# Altium PCB DisplayBoard.PcbDoc
Units mil, origin at the board's own origin, x right, y up, seen from the top; angles counter-clockwise.
Board outline 4783.46 x 2992.13 mil, 2 copper layers (Top Layer, Bottom Layer); 11 components, 12 nets, 62 pads, 0 vias.
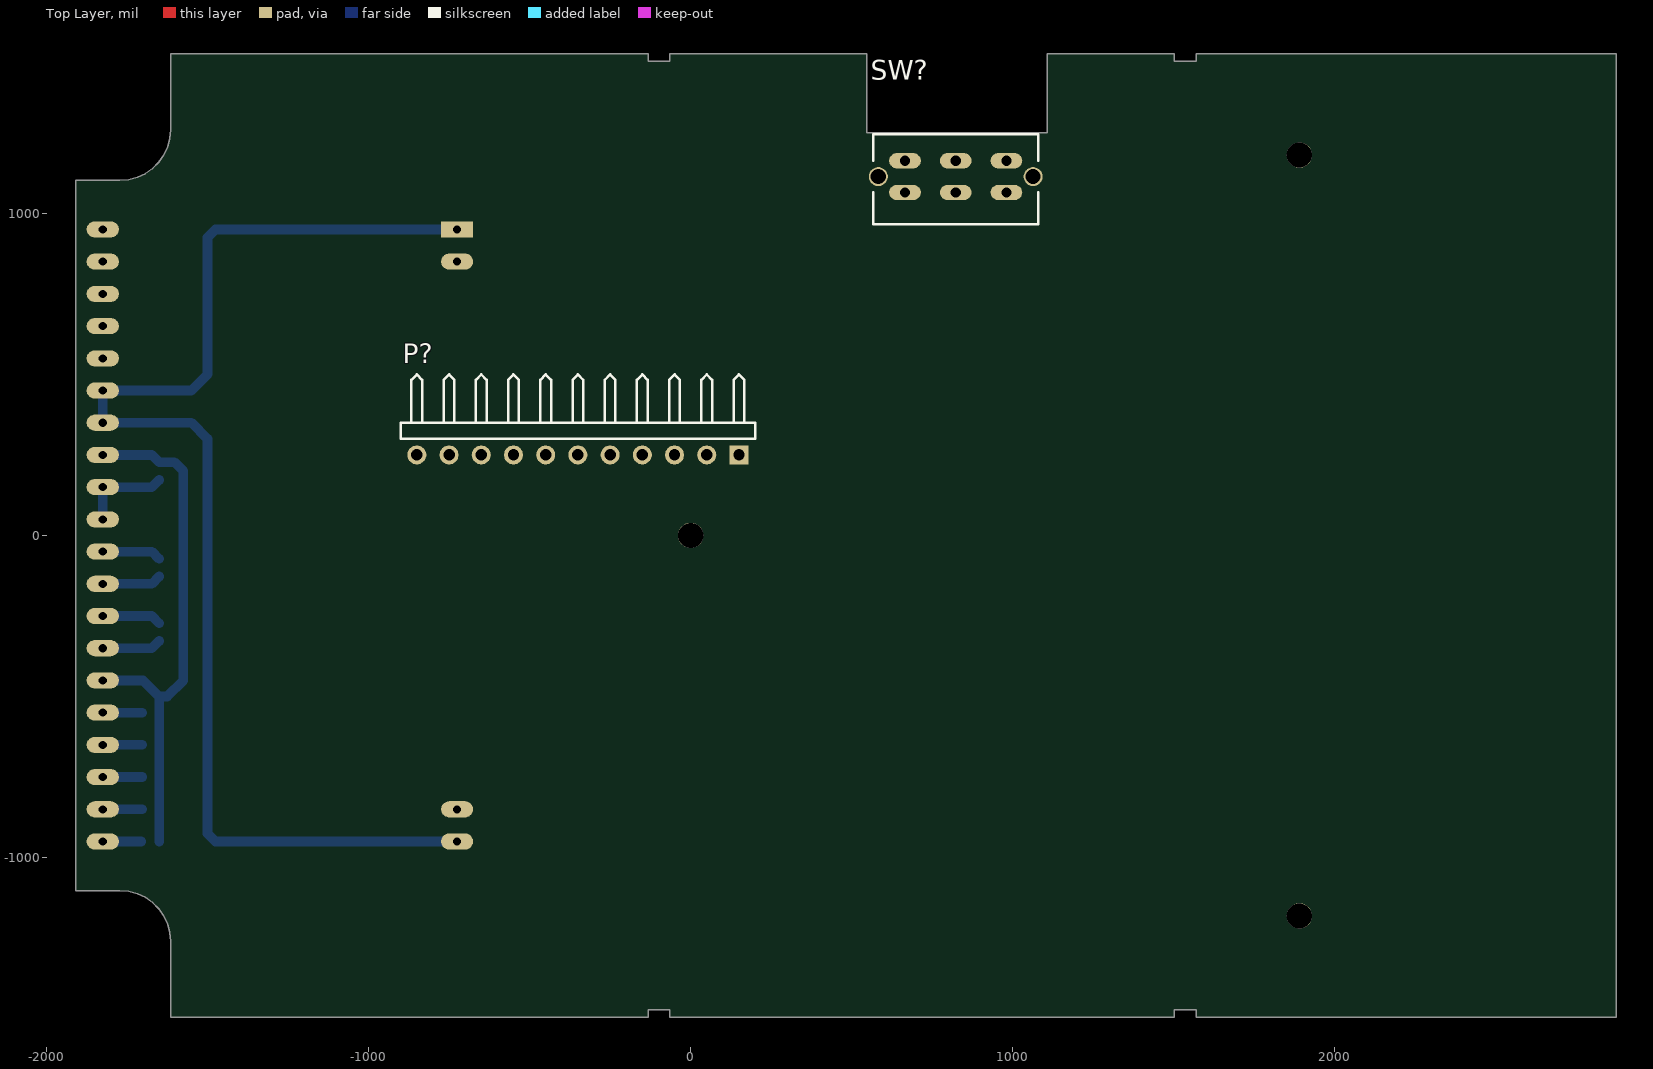
[diagram p0: Top Layer view]
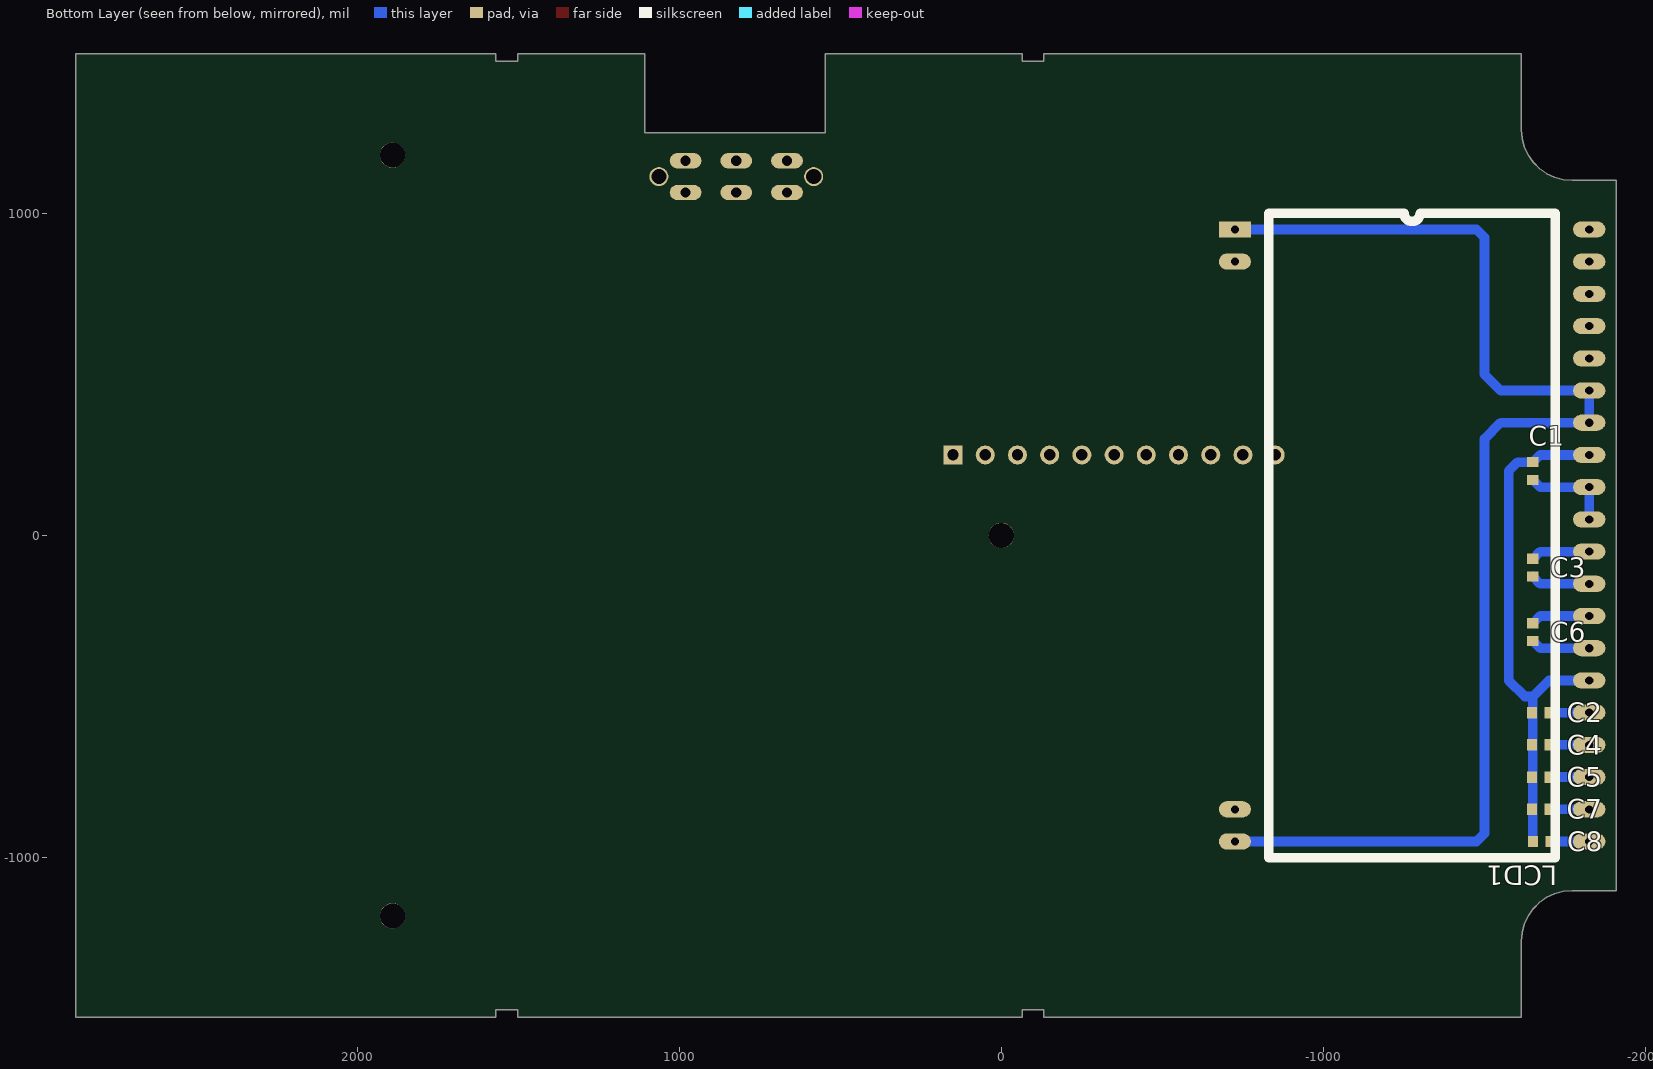
[diagram p1: Bottom Layer view, seen from below]

## Layer stack, top to bottom
Top Solder: solder mask 0.4, Solder Resist, Dk 3.5
Top Layer: signal copper 1.4
Dielectric 1: dielectric 12.6, FR-4, Dk 4.8
Bottom Layer: signal copper 1.4
Bottom Solder: solder mask 0.4, Solder Resist, Dk 3.5

## Board outline
-1614.17,1496.06 -1614.17,1259.84 -1616.57,1232.5 -1623.67,1205.98 -1635.27,1181.1 -1651.02,1158.62 -1670.43,1139.21 -1692.91,1123.46 -1717.79,1111.86 -1744.31,1104.75 -1771.65,1102.36 -1909.45,1102.36 -1909.45,-1102.36 -1771.65,-1102.36 -1744.31,-1104.75 -1717.79,-1111.86 -1692.91,-1123.46 -1670.43,-1139.21 -1651.02,-1158.62 -1635.27,-1181.1 -1623.67,-1205.98 -1616.57,-1232.5 -1614.17,-1259.84 -1614.17,-1496.06 -131.89,-1496.06 -131.89,-1472.44 -64.96,-1472.44 -64.96,-1496.06 1501.97,-1496.06 1501.97,-1472.44 1568.9,-1472.44 1568.9,-1496.06 2874.02,-1496.06 2874.02,1496.06 1568.9,1496.06 1568.9,1472.44 1501.97,1472.44 1501.97,1496.06 1106.3,1496.06 1106.3,1250 547.24,1250 547.24,1496.06 -64.96,1496.06 -64.96,1472.44 -131.89,1472.44 -131.89,1496.06

## Design rules (kind name [scope] priority, off if disabled: settings)
Clearance [All] p1: gap=10 ignorepadtopadclearanceinfootprint=FALSE except(0: Arc-Hole Track-Hole SMDPad-Hole THPad-Hole Via-Hole Fill-Hole Poly-Hole Region-Hole Text-Hole)
PolygonConnect [All] p1: connectstyle=Relief reliefconductorwidth=10 reliefentries=4 polygonreliefangle="90 Angle" airgapwidth=10
RoutingVias [All] p1: holewidth=28 width=50 viastyle="Through Hole" minholewidth=28 minwidth=50 maxholewidth=28 maxwidth=50
SolderMaskExpansion [All] p1: expansion=4
Width [All] p1: maxlimit=40 minlimit=10 preferedwidth=12
30 further rules are at their usual default settings.

## Components (designator, comment, footprint, x,y, rotation, side; value= is the part's Value field where it differs from the comment)
C1 "Cap Semi" 1608[0603] -1650,200 r270 bottom value=1uF
C2 "Cap Semi" 1608[0603] -1675,-550 r180 bottom value=1uF
C3 "Cap Semi" 1608[0603] -1650,-100 r270 bottom value=1uF
C4 "Cap Semi" 1608[0603] -1675,-650 r180 bottom value=1uF
C5 "Cap Semi" 1608[0603] -1675,-750 r180 bottom value=1uF
C6 "Cap Semi" 1608[0603] -1650,-300 r270 bottom value=1uF
C7 "Cap Semi" 1608[0603] -1675,-850 r180 bottom value=1uF
C8 "Cap Semi" 1608[0603] -1677.56,-950 r180 bottom value=1uF
LCD1 "EA DOGM132" "EA DOGM132-5" -725,950 r180 bottom locked
P? "Header 11H" HDR1X11H 150,250 r180 top
SW? "DPDT" SW-EG2215 665.35,1064.96 r90 top

## Footprints (in the part's own frame and the unit in brackets; to place one, negate y for a bottom-side part, rotate by r counter-clockwise, add the part's x,y. Pads: shape width x height; smd on the part's side, far side on the other; paste and mask are expansions set on the pad)
1608[0603] [mm] "Chip Capacitor, Body 1.6x0.8mm, IPC High Density"
  rect 0.8x0.9 smd: 1(-0.7,0) 2(0.7,0)
  body extent -0.87,-0.48 0.87,0.48, height 1.3
"EA DOGM132-5" [mil]
  rect 100x50 hole 25: 1(0,0)
  oval 100x50 hole 25: 2(0,-100) 19(0,-1800) 20(0,-1900) 21(1100,-1900) 22(1100,-1800) 23(1100,-1700) 24(1100,-1600) 25(1100,-1500) 26(1100,-1400) 27(1100,-1300) 28(1100,-1200) 29(1100,-1100) 30(1100,-1000) 31(1100,-900) 32(1100,-800) 33(1100,-700) 34(1100,-600) 35(1100,-500) 36(1100,-400) 37(1100,-300) 38(1100,-200) 39(1100,-100) 40(1100,0)
  silkscreen extent 105,-1950 995,50, body extent -21,-2034 1118,131, height 169
HDR1X11H [mm] "Connector; Header; 11 Position; Right Angle"
  rect 1.5x1.5 hole 0.9: 1(0,0)
  round 1.5 hole 0.9: 2(2.54,0) 3(5.08,0) 4(7.62,0) 5(10.16,0) 6(12.7,0) 7(15.24,0) 8(17.78,0) 9(20.32,0) 10(22.86,0) 11(25.4,0)
  silkscreen extent -1.27,-6.35 26.67,-1.27
SW-EG2215 [mm]
  round 1.5 hole 1.2: 0(1.25,2.1) 0(1.25,-10.1)
  oval 1.2x2.5 hole 0.8: 1(0,0) 2(0,-4) 3(0,-8) 4(2.5,-8) 5(2.5,-4) 6(2.5,0)
  silkscreen extent -2.5,-10.5 4.6,2.5, body extent -2.2,-10.3 8.1,2.3, height 4.7

## Part data
C1 C2 C3 C4 C5 C6 C7 C8: "Capacitor (Semiconductor SIM Model)", LatestRevisionDate=29-May-2009, LatestRevisionNote="IPC-7351 Footprint Added.", PackageDescription="Chip Capacitor", PackageReference=C1206, Published=8-Jun-2000, Publisher="Altium Limited"
LCD1: "132x32 graphical LCD"
P?: "Header, 11-Pin, Right Angle", LatestRevisionDate=17-Jul-2002, LatestRevisionNote="Re-released for DXP Platform.", Publisher="Altium Limited"
SW?: library part SW-DPDT

## Free pads (board coordinates)
  round 78.74 hole 78.74: 1(0,0) 1(1889.76,-1181.1) 1(1889.76,1181.1)

## Nets (pads, with @x,y where several pads share a name; then routed paths per layer and width w, separated by ;. In a path a pad name is that pad's centre, name@x,y a point inside that pad or via, vN(x,y) a via of type N, cw(c..) or ccw(c..) an arc to the next point about the centre after c; other vN are vias at no path point)
GND: C1.1 C2.1 C4.1 C5.1 C7.1 C8.1 LCD1.26 LCD1.33 | length 1662.1
  Bottom Layer w30: LCD1.26 -1700,-450 -1650,-500 ; LCD1.33 -1672.44,250 C1.1 -1602.56,227.56 -1575,200 -1575,-450 -1625,-500 -1650,-500 ; C8.1 -1650,-500
NetC1_2: C1.2 LCD1.31 LCD1.32 | length 284.3
  Bottom Layer w30: LCD1.31 LCD1.32 -1672.44,150 C1.2
NetC2_2: C2.2 LCD1.25 | length 122.4
  Bottom Layer w30: LCD1.25 C2.2
NetC3_1: C3.1 LCD1.30 | length 184.3
  Bottom Layer w30: LCD1.30 -1672.44,-50 C3.1
NetC3_2: C3.2 LCD1.29 | length 184.3
  Bottom Layer w30: LCD1.29 -1672.44,-150 C3.2
NetC4_2: C4.2 LCD1.24 | length 122.4
  Bottom Layer w30: LCD1.24 C4.2
NetC5_2: C5.2 LCD1.23 | length 122.4
  Bottom Layer w30: LCD1.23 C5.2
NetC6_1: C6.1 LCD1.28 | length 184.3
  Bottom Layer w30: LCD1.28 -1672.44,-250 C6.1
NetC6_2: C6.2 LCD1.27 | length 184.3
  Bottom Layer w30: LCD1.27 -1672.44,-350 C6.2
NetC7_2: C7.2 LCD1.22 | length 122.4
  Bottom Layer w30: LCD1.22 C7.2
NetC8_2: C8.2 LCD1.21 | length 119.9
  Bottom Layer w30: LCD1.21 C8.2
VCC: LCD1.1 LCD1.20 LCD1.34 LCD1.35 | length 4012.1
  Bottom Layer w30: LCD1.20 -1475,-950 -1500,-925 -1500,300 -1550,350 LCD1.34 LCD1.35 -1550,450 -1500,500 -1500,925 -1475,950 LCD1.1
pads on no net: LCD1.2 LCD1.19 LCD1.36 LCD1.37 LCD1.38 LCD1.39 LCD1.40 P?.1 P?.2 P?.3 P?.4 P?.5 P?.6 P?.7 P?.8 P?.9 P?.10 P?.11 SW?.0 SW?.1 SW?.2 SW?.3 SW?.4 SW?.5 SW?.6